# EAGLE board bb (EAGLE 6.3)
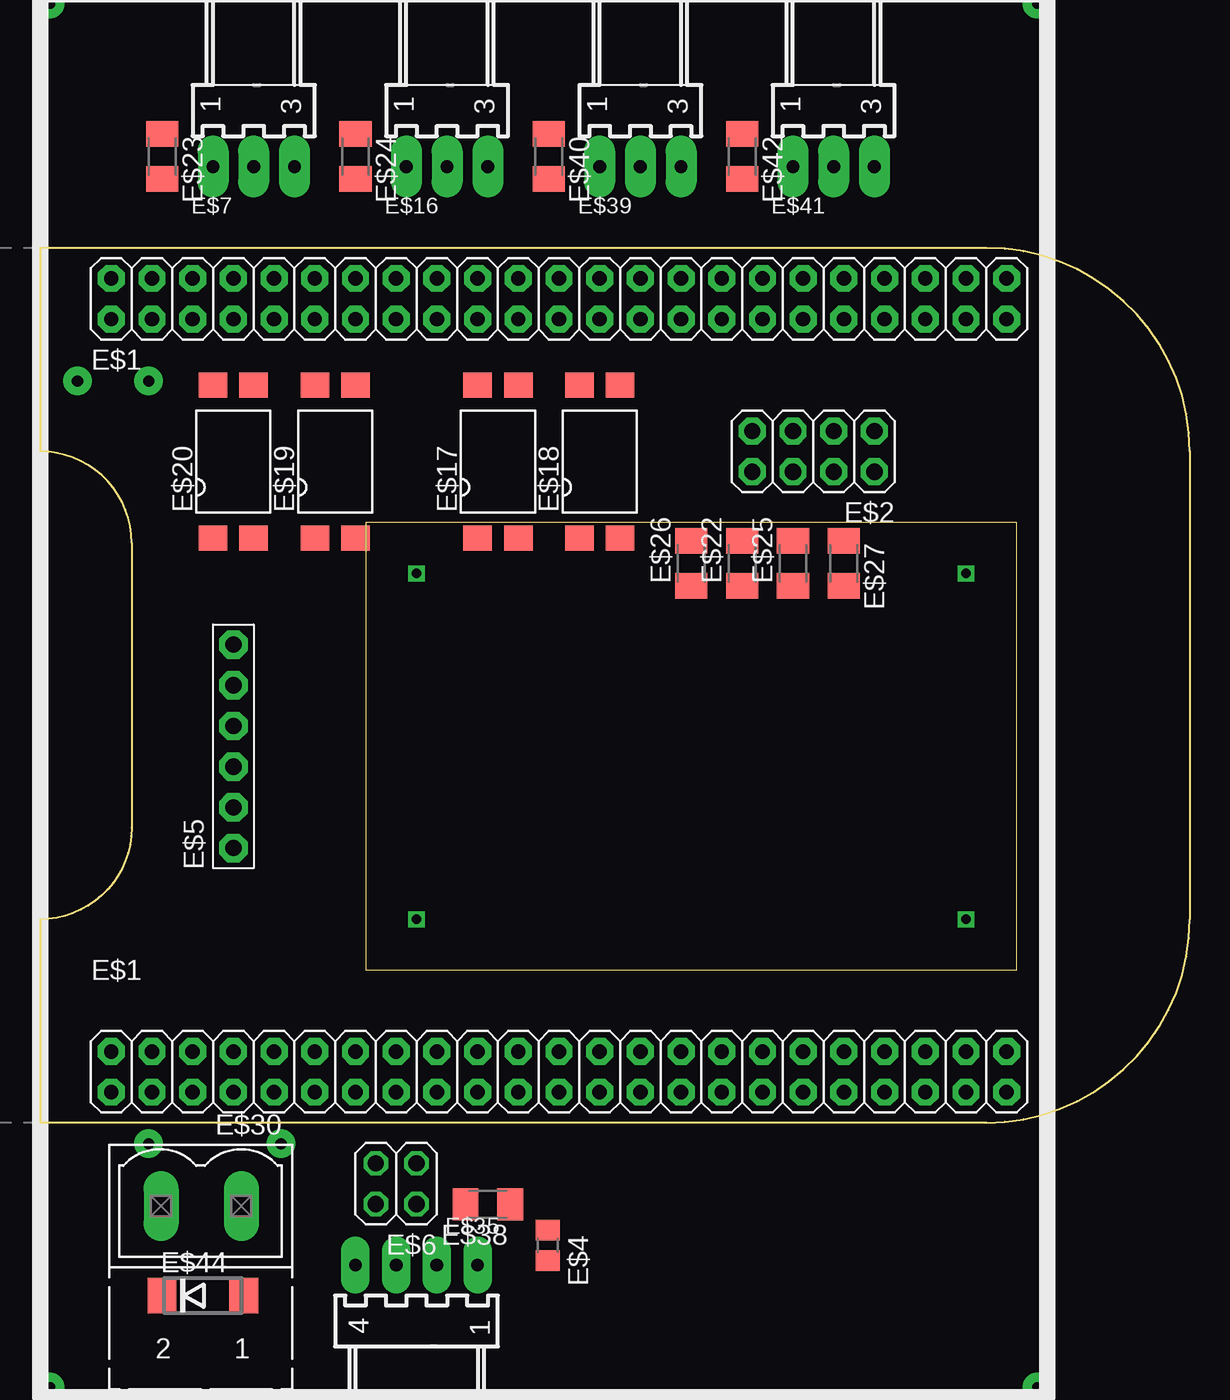
[diagram p0: board, top side]
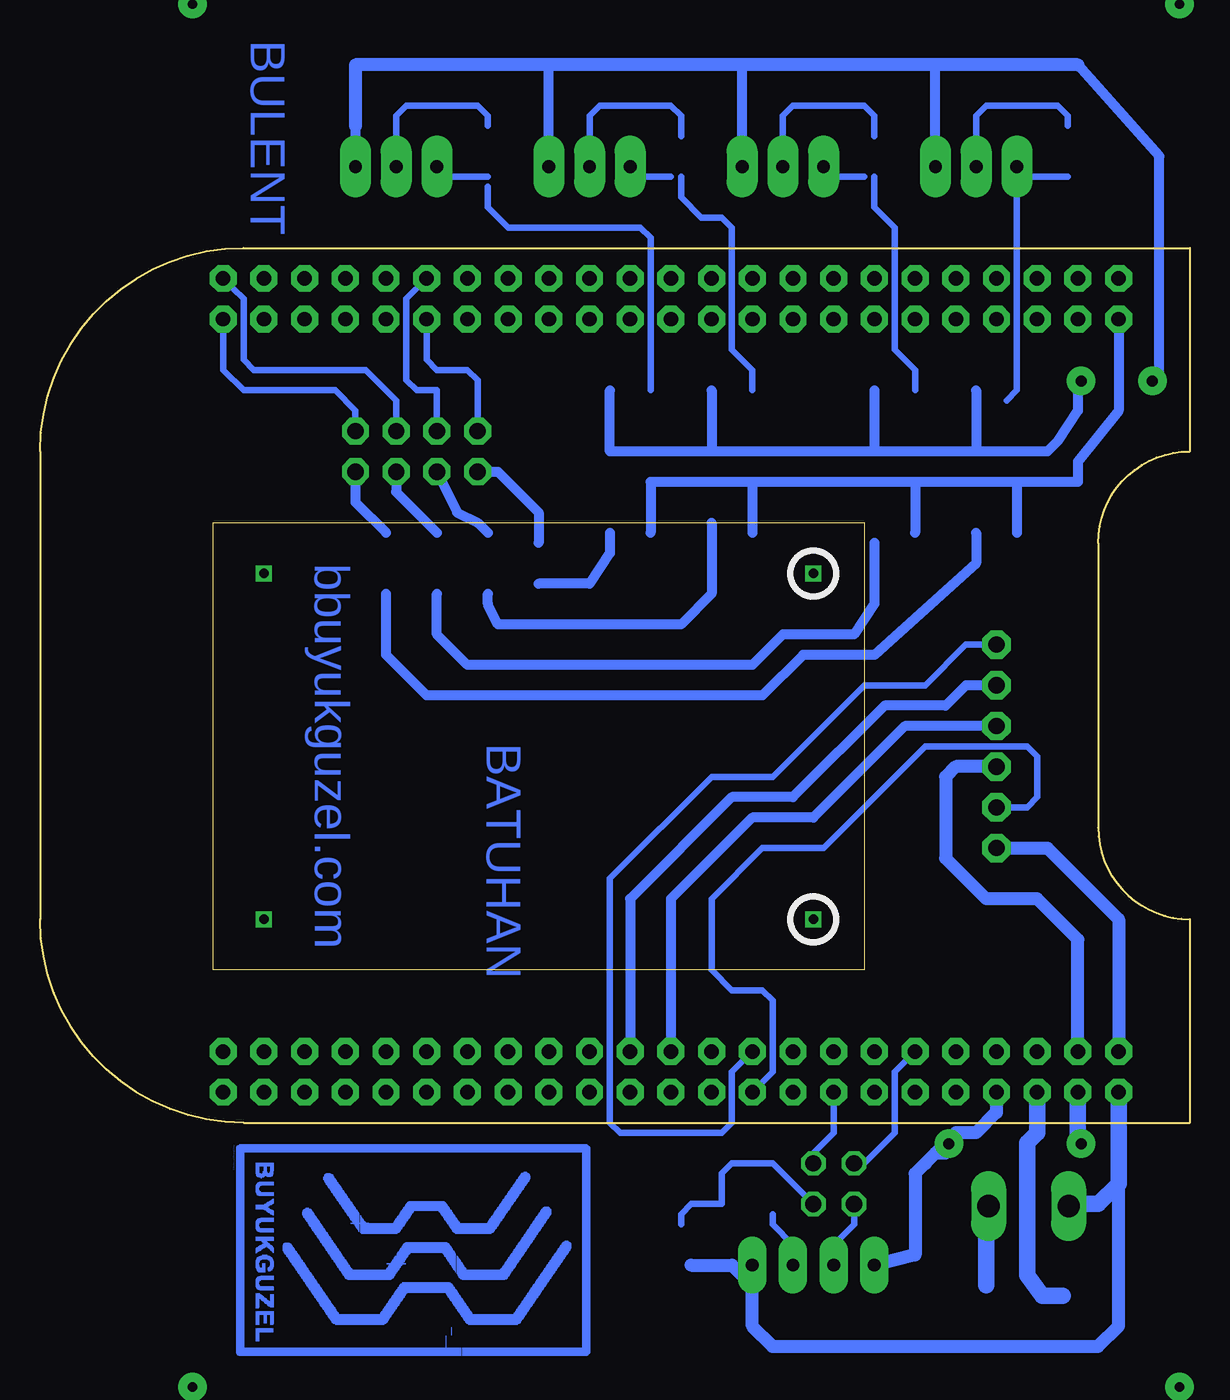
[diagram p1: board, bottom side, seen from below]

Size 71.75 x 54.61 mm. Coordinates in mm from the lower left corner, seen from the top.
Copper layers (1*16): Top 0.035mm / dielectric 1.5mm / Bottom 0.035mm
Design rules "default": minimum track width 10mil, minimum drill 24mil, track to track 8mil, track to pad 8mil, pad to pad 8mil, via to via 8mil, smd to smd 8mil, copper to edge 40mil, drill to drill 8mil, minimum pad ring 10mil, minimum via ring 8mil, stop-mask expansion 4mil, vias tented up to drill 0mil, thermal gap 10mil

## Footprints (pad centres in the part's own frame; a part is rotated, then mirrored left to right if it is on the bottom)
BEAGLEBONE_SHIELD = drill 0.9 pad 1.676 octagon: 1 4.445,19.05; 2 1.905,19.05; 3 4.445,21.59; 4 1.905,21.59; 5 4.445,24.13; 6 1.905,24.13; 7 4.445,26.67; 8 1.905,26.67; 9 4.445,29.21; 10 1.905,29.21; 11 4.445,31.75; 12 1.905,31.75; 13 4.445,34.29; 14 1.905,34.29; 15 4.445,36.83; 16 1.905,36.83; 17 4.445,39.37; 18 1.905,39.37; 19 4.445,41.91; 20 1.905,41.91; 21 4.445,44.45; 22 1.905,44.45; 23 4.445,46.99; 24 1.905,46.99; 25 4.445,49.53; 26 1.905,49.53; 27 4.445,52.07; 28 1.905,52.07; 29 4.445,54.61; 30 1.905,54.61; 31 4.445,57.15; 32 1.905,57.15; 33 4.445,59.69; 34 1.905,59.69; 35 4.445,62.23; 36 1.905,62.23; 37 4.445,64.77; 38 1.905,64.77; 39 4.445,67.31; 40 1.905,67.31; 41 4.445,69.85; 42 1.905,69.85; 43 4.445,72.39; 44 1.905,72.39; 45 4.445,74.93; 46 1.905,74.93; 47 52.705,19.05; 48 50.165,19.05; 49 52.705,21.59; 50 50.165,21.59; 51 52.705,24.13; 52 50.165,24.13; 53 52.705,26.67; 54 50.165,26.67; 55 52.705,29.21; 56 50.165,29.21; 57 52.705,31.75; 58 50.165,31.75; 59 52.705,34.29; 60 50.165,34.29; 61 52.705,36.83; 62 50.165,36.83; 63 52.705,39.37; 64 50.165,39.37; 65 52.705,41.91; 66 50.165,41.91; 67 52.705,44.45; 68 50.165,44.45; 69 52.705,46.99; 70 50.165,46.99; 71 52.705,49.53; 72 50.165,49.53; 73 52.705,52.07; 74 50.165,52.07; 75 52.705,54.61; 76 50.165,54.61; 77 52.705,57.15; 78 50.165,57.15; 79 52.705,59.69; 80 50.165,59.69; 81 52.705,62.23; 82 50.165,62.23; 83 52.705,64.77; 84 50.165,64.77; 85 52.705,67.31; 86 50.165,67.31; 87 52.705,69.85; 88 50.165,69.85; 89 52.705,72.39; 90 50.165,72.39; 91 52.705,74.93; 92 50.165,74.93
2X04 = drill 1.016 pad 1.676 octagon: 1 -3.81,-1.27; 2 -3.81,1.27; 3 -1.27,-1.27; 4 -1.27,1.27; 5 1.27,-1.27; 6 1.27,1.27; 7 3.81,-1.27; 8 3.81,1.27
R0805 = smd 1.3 x 1.5: 1 -0.95,0; 2 0.95,0
1X06-BIG = drill 1.016 pad 1.778 octagon: 1 -6.35,0; 2 -3.81,0; 3 -1.27,0; 4 1.27,0; 5 3.81,0; 6 6.35,0
2X02 = drill 1.016 octagon: 1 -1.27,-1.27; 2 -1.27,1.27; 3 1.27,-1.27; 4 1.27,1.27
7395-03 = drill 0.8 pad 1.93 long: 1 2.54,0; 2 0,0; 3 -2.54,0
SMD4-7 = smd 1.78 x 1.55: 1 -1.27,-4.77; 2 1.27,-4.77; 3 1.27,4.77; 4 -1.27,4.77
M1206 = smd 1.6 x 2: 1 -1.4,0; 2 1.4,0
MSTBV2 = drill 1.397 pad 2.184 long: 1 -2.5,0; 2 2.5,0
7395-04 = drill 0.8 pad 1.778 long: 1 3.81,0; 2 1.27,0; 3 -1.27,0; 4 -3.81,0
DO214AA = smd 1.8 x 2.2: A 2.55,0; C -2.55,0

## Placement (x,y rotation side)
E$1  [BEAGLEBONE_SHIELD]  -14.61,54.61 270 top
E$2  [2X04]  48.26,41.91 180 top
E$4  [R0805]  31.69,-7.66 270 top  (outside the outline)
E$5  [1X06-BIG]  12.06,23.49 90 top
E$6  [2X02]  22.22,-3.81 180 top
E$7  [7395-03]  13.34,59.69 180 top  (outside the outline)
E$16  [7395-03]  25.4,59.69 180 top  (outside the outline)
E$17  [SMD4-7]  28.58,41.28 0 top
E$18  [SMD4-7]  34.92,41.28 0 top
E$19  [SMD4-7]  18.41,41.28 0 top
E$20  [SMD4-7]  12.06,41.28 0 top
E$22  [M1206]  43.81,34.92 90 top
E$23  [M1206]  7.62,60.33 270 top  (outside the outline)
E$24  [M1206]  19.68,60.33 270 top  (outside the outline)
E$25  [M1206]  46.99,34.92 90 top
E$26  [M1206]  40.64,34.92 90 top
E$27  [M1206]  50.16,34.92 270 top
E$30  [MSTBV2]  10.06,-5.21 180 top  (outside the outline)
E$35  [7395-04]  23.5,-8.89 0 top  (outside the outline)
E$38  [M1206]  27.94,-5.11 180 top  (outside the outline)
E$39  [7395-03]  37.47,59.69 180 top  (outside the outline)
E$40  [M1206]  31.75,60.33 270 top  (outside the outline)
E$41  [7395-03]  49.53,59.69 180 top  (outside the outline)
E$42  [M1206]  43.81,60.33 270 top  (outside the outline)
E$44  [DO214AA]  10.16,-10.79 0 top  (outside the outline)

## Library data of the parts
E$1 E$2 E$5 = adafruit
E$4 = rcl
E$6 = pinhead
E$7 E$16 E$35 E$39 E$41 = con-molex
E$17-E$20 = optocoupler
E$22-E$27 E$38 E$40 E$42 = resistor
E$30 = con-phoenix-500
E$44 = diode

## Nets
S$1: E$7.2
S$2: E$1.1
S$4: E$1.66 E$5.6
S$16: E$6.4
S$21: E$1.61
S$24: E$2.8
S$27: E$2.7
S$31: E$1.48 E$5.1
S$32: E$1.50 E$5.3
S$33: E$1.65 E$5.2
S$34: E$2.6
S$35: E$1.53 E$35.4
S$36: E$1.36 E$2.5
S$37: E$2.4
S$38: E$2.1
S$39: E$2.3
S$40: E$1.49
S$41: E$2.2
S$49: E$1.70 E$5.4
S$50: E$1.72 E$5.5
S$53: E$1.58

## Tracks (layer width: path | path; a pad name or v marks a point on that pad's centre or on a via)
S$1
  Top 0.61: E$7.2 13.34,58.42
S$2
  Bottom 0.61: E$1.1 4.45,44.45 6.98,41.28 6.98,40.01 10.8,40.01 | 10.8,40.01 17.14,40.01 | 17.14,40.01 27.3,40.01 | 27.3,40.01 33.66,40.01 33.66,36.83 | 27.3,40.01 27.3,36.83 | 17.14,40.01 17.14,36.83 | 10.8,40.01 10.8,36.83
S$3  (via drill 0.6 pad 1.78)
  other vias: 62.23,-16.51
S$4
  Bottom 0.406: E$1.66 28.58,3.18 28.58,0 29.21,-0.63 35.56,-0.63 36.19,0 36.19,15.24 29.84,21.59 26.03,21.59 20.32,27.3 16.51,27.3 13.97,29.84 E$5.6
S$5
  Bottom 0.61: 6.98,45.72 6.98,44.45 8.25,42.55 8.89,41.91 13.34,41.91 | 13.34,41.91 19.68,41.91 | 19.68,41.91 29.84,41.91 | 29.84,41.91 36.19,41.91 36.19,45.72 | 29.84,45.72 29.84,41.91 | 19.68,45.72 19.68,41.91 | 13.34,45.72 13.34,41.91
S$6
  Bottom 0.406: 10.8,58.42 10.8,45.72 11.43,45.08
S$7
  Bottom 0.406: 43.81,58.42 43.81,57.15 42.55,55.88 34.29,55.88 33.66,55.25 33.66,45.72
S$8
  Bottom 0.406: 20.32,59.06 22.86,59.06
S$9
  Bottom 0.406: 31.75,59.06 31.75,57.78 30.48,56.52 29.21,56.52 28.58,55.88 28.58,48.26 27.3,46.99 27.3,45.72
S$10
  Bottom 0.406: 32.39,59.06 34.92,59.06
S$11
  Bottom 0.61: 29.84,37.47 29.84,33.02 31.75,31.12 43.18,31.12 43.81,32.38 43.81,33.02
S$12
  Bottom 0.406: 7.62,62.23 7.62,62.86 8.25,63.5 12.7,63.5 13.34,62.86 13.34,60.96
S$13
  Bottom 0.406: 19.68,61.59 19.68,62.86 20.32,63.5 24.77,63.5 25.4,62.86 25.4,60.96
S$14
  Bottom 0.406: 31.75,61.59 31.75,62.86 32.39,63.5 36.83,63.5 37.47,62.86 37.47,60.96
S$15
  Bottom 0.406: 43.81,59.06 46.99,59.06
S$16
  Bottom 0.406: E$6.4 20.95,-6.35 22.22,-7.62
S$17
  Bottom 0.406: 7.62,59.06 10.8,59.06
S$18
  Bottom 0.406: 43.81,62.23 43.81,62.86 44.45,63.5 48.89,63.5 49.53,62.86 49.53,60.96
S$19
  Bottom 0.61: 15.88,60.96 15.88,66.04 | 27.94,60.96 27.94,66.04 | 40,60.96 40,66.04 | 1.91,46.36 1.91,60.33 6.98,66.04 | 52.07,63.5 52.07,60.96
  Bottom 0.813: 6.98,66.04 15.88,66.04 27.94,66.04 40,66.04 52.07,66.04 52.07,63.5 52.07,62.23
S$20
  Bottom 0.406: 26.03,-5.71 26.03,-6.35 24.77,-7.62
S$21
  Bottom 0.406: E$1.61 22.22,-0.63 23.5,-1.91
S$23
  Bottom 0.61: 19.68,36.2 19.68,32.38 20.95,30.48 25.4,30.48 27.3,28.58 45.08,28.58 46.99,30.48 46.99,33.02
S$24
  Bottom 0.61: E$2.8 43.18,40.64 40.64,38.1 40.64,36.2
S$25
  Bottom 1.016: 9.52,1.27 9.52,-0.63 10.16,-1.27 10.16,-9.52 9.21,-10.79 7.94,-10.79
S$26  (via drill 0.7 pad 1.78)
  other vias: 2.34,46.3
S$27
  Bottom 0.406: E$2.7 44.45,46.36 45.08,46.99 46.99,46.99 47.62,47.62 47.62,49.53
S$28
  Bottom 1.016: 12.7,-6.35 12.7,-10.16
S$29
  Bottom 0.406: 19.68,59.06 19.68,57.15 18.41,55.88 18.41,48.26 17.14,46.99 17.14,45.72
S$31
  Bottom 0.813: E$5.1 8.89,17.15 4.45,12.7 E$1.48
S$32
  Bottom 0.813: E$5.3 14.6,22.23 15.24,21.59 15.24,16.51 12.7,13.97 9.52,13.97 6.98,11.43 E$1.50
S$33
  Bottom 0.406: E$5.2 10.16,19.69 9.52,20.32 9.52,22.86 10.16,23.49 16.51,23.49 22.86,17.15 26.67,17.15 29.84,13.97 29.84,9.52 28.58,8.25 26.67,8.25 26.03,7.62 26.03,3.18 E$1.65
S$34
  Bottom 0.61: E$2.6 45.72,38.1 44.45,37.47 43.81,36.83
S$35
  Bottom 0.813: E$1.53 12.06,0.64 13.34,-0.63 14.6,-0.63 15.88,-1.91 | 15.24,-1.27 15.24,-1.91 15.88,-1.91 | 15.88,-1.91 16.51,-2.54 17.14,-3.18 17.14,-8.25 E$35.4
S$36
  Bottom 0.406: E$2.5 46.99,45.72 48.26,45.72 48.89,46.36 48.89,51.44 E$1.36
S$37
  Bottom 0.61: E$2.4 49.53,39.37 46.99,36.83
S$38
  Bottom 0.406: 60.33,49.53 60.33,46.99 59.05,45.72 53.34,45.72 52.07,44.45 E$2.1
S$39
  Bottom 0.406: E$2.3 49.53,45.08 51.44,46.99 52.07,46.99 52.7,46.99 58.42,46.99 59.05,47.62 59.05,51.44 59.69,52.07
S$40
  Bottom 1.016: E$1.49 6.98,-1.27
S$41
  Bottom 0.61: E$2.2 52.07,38.73 50.16,36.83
S$42
  Bottom 0.813: 31.11,-8.89 28.58,-8.89 27.3,-10.16 27.3,-12.7 26.03,-13.97 5.71,-13.97 4.45,-12.7 4.45,-3.81
  Bottom 1.016: 4.45,1.27 4.45,-3.81 5.71,-5.08 6.98,-5.08
S$43
  Bottom 0.61: 36.19,36.83 36.19,35.56 37.47,33.66 40.64,33.66
S$44
  Bottom 0.61: 13.34,36.83 13.34,34.92 19.68,29.21 24.13,29.21 26.67,26.67 47.62,26.67 50.16,29.21 50.16,33.02
S$45  (via drill 0.6)
  other vias: 23.5,34.29
S$46  (via drill 0.6)
  other vias: 23.5,12.7
S$47  (via drill 0.6)
  other vias: 57.78,12.7
S$48  (via drill 0.7 pad 1.78)
  other vias: 6.78,46.3
S$49
  Bottom 0.61: E$5.4 17.78,24.77 23.5,19.05 27.3,19.05 32.39,13.97 E$1.70
S$50
  Bottom 0.61: E$5.5 13.97,27.3 15.24,26.04 19.05,26.04 24.77,20.32 28.58,20.32 34.92,13.97 E$1.72
S$51  (via drill 0.7 pad 1.78)
  other vias: 15.04,-1.32
S$52  (via drill 0.6)
  other vias: 57.78,34.29
S$53
  Bottom 0.406: E$1.58 18.41,3.18 18.41,-0.63 20.32,-2.54
S$54
  Bottom 0.406: 24.13,-4.45 26.03,-2.54 28.58,-2.54 29.21,-3.18 29.21,-5.08 31.11,-5.08 31.75,-5.71 31.75,-6.35
S$55  (via drill 0.6 pad 1.78)
  other vias: 0.63,69.85
S$56  (via drill 0.6 pad 1.78)
  other vias: 62.23,69.85
S$57  (via drill 0.6 pad 1.78)
  other vias: 0.63,-16.51
S$58  (via drill 0.7 pad 1.78)
  other vias: 6.78,-1.32 6.78,-1.32
(copper drawn outside any net)
  shapes: Bottom area x2792

## Text on the board
Bottom: BULENT | bbuyukguzel.com | BATUHAN | E:/batuhan_pcb/Drawing14.bmp